# EAGLE board pcb (EAGLE 6.3)
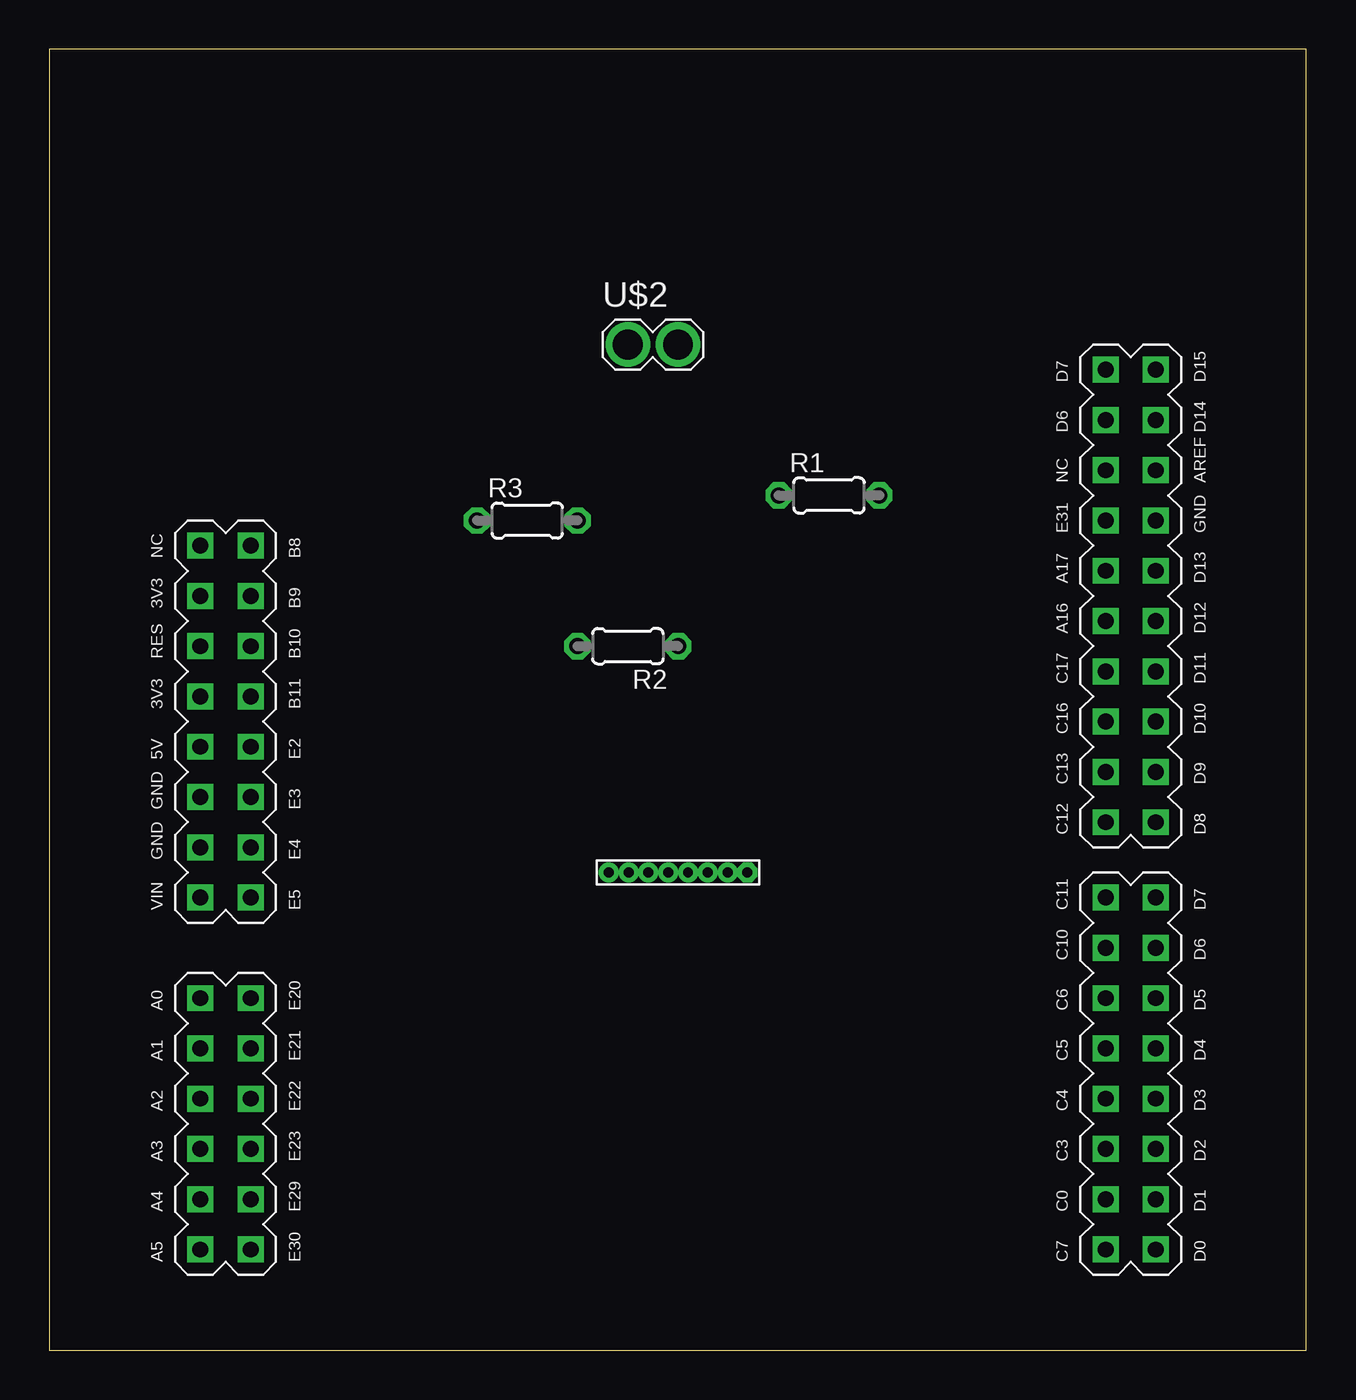
[diagram p0: board, top side]
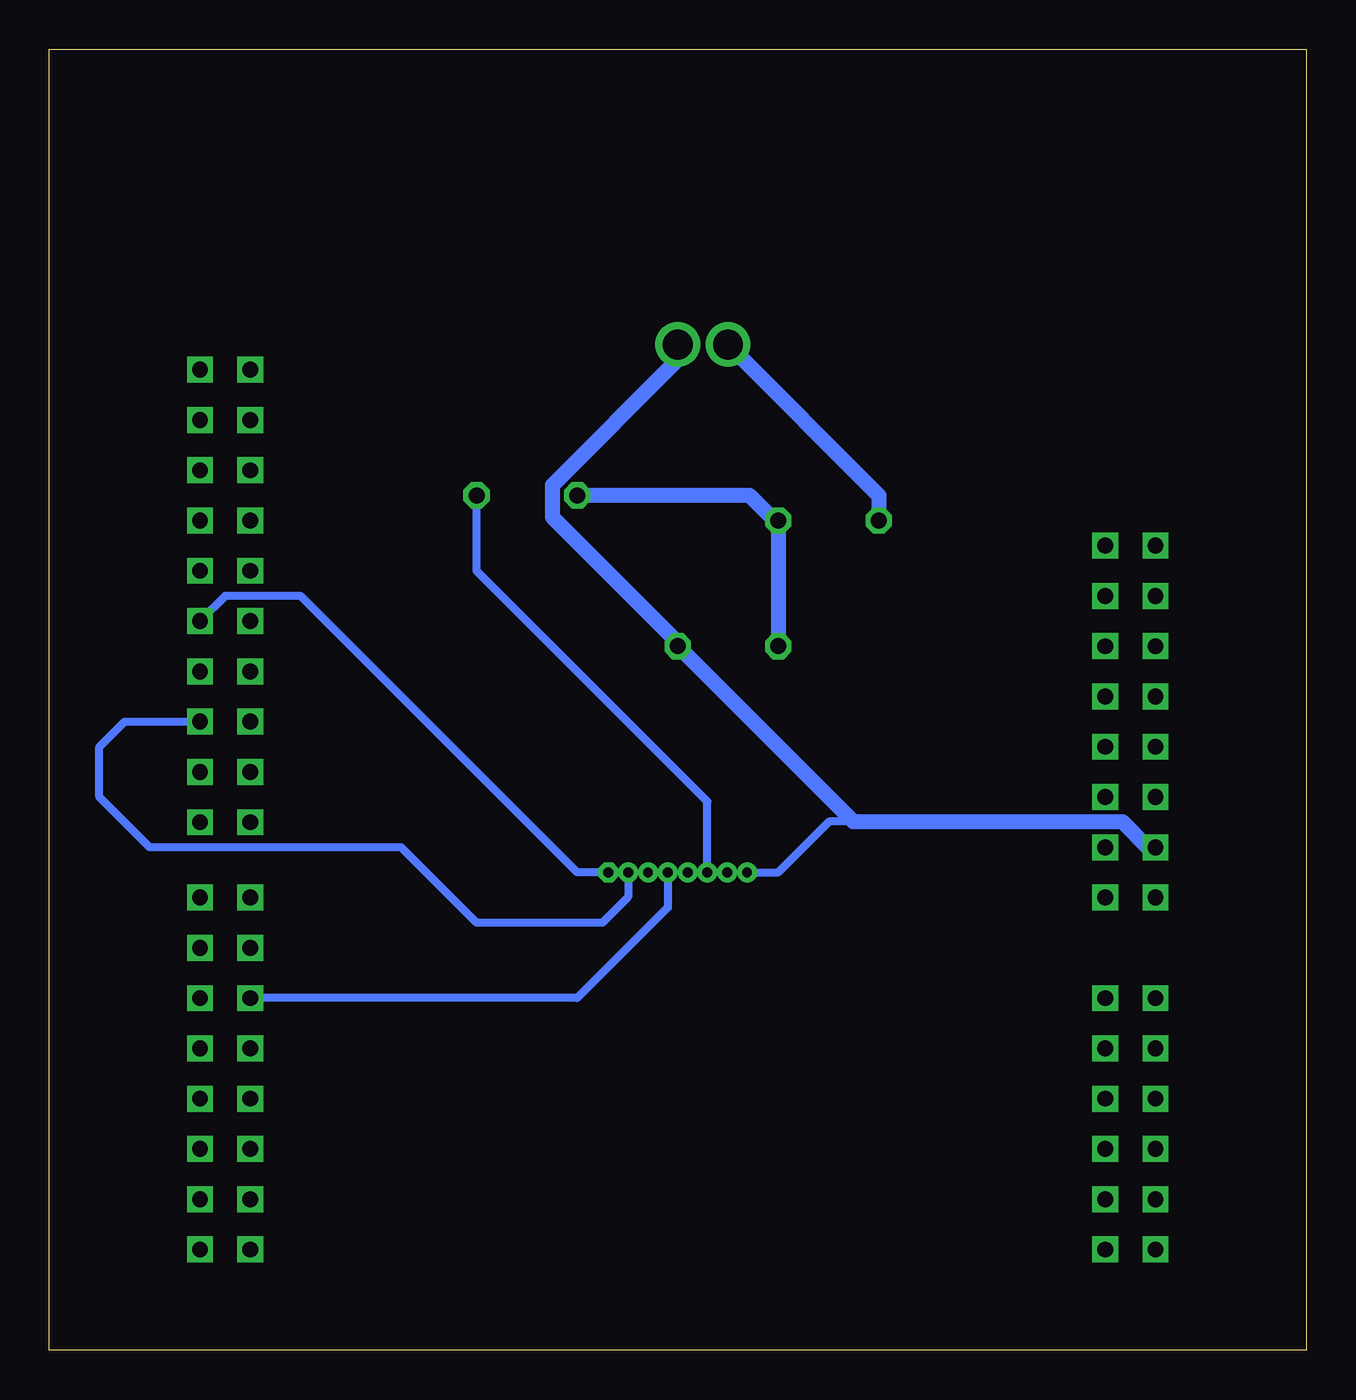
[diagram p1: board, bottom side, seen from below]

Size 63.48 x 65.71 mm. Coordinates in mm from the lower left corner, seen from the top.
Outline: 0,0 63.48,0 63.48,65.71 0,65.71 0,0
Copper layers (1*16): Top 0.035mm / dielectric 1.5mm / Bottom 0.035mm
Design rules "default *": minimum track width 30mil, minimum drill 24mil, track to track 8mil, track to pad 8mil, pad to pad 8mil, via to via 8mil, smd to smd 8mil, copper to edge 40mil, drill to drill 8mil, minimum pad ring 10mil, minimum via ring 8mil, stop-mask expansion 4mil, vias tented up to drill 0mil, thermal gap 10mil

## Footprints (pad centres in the part's own frame; a part is rotated, then mirrored left to right if it is on the bottom)
FRDM-KL25Z = drill 0.8 square: 3V3 -22.86,12.7; 5V -22.86,5.08; A0 -22.86,-7.62; A1 -22.86,-10.16; A2 -22.86,-12.7; A3 -22.86,-15.24; A4 -22.86,-17.78; A5 -22.86,-20.32; AREF 25.4,19.05; D0 25.4,-20.32; D1 25.4,-17.78; D2 25.4,-15.24; D3 25.4,-12.7; D4 25.4,-10.16; D5 25.4,-7.62; D6 25.4,-5.08; D7 25.4,-2.54; D8 25.4,1.27; D9 25.4,3.81; D10 25.4,6.35; D11 25.4,8.89; D12 25.4,11.43; D13 25.4,13.97; D14 25.4,21.59; D15 25.4,24.13; GND0 -22.86,0; GND1 -22.86,2.54; GND2 25.4,16.51; NC1 -22.86,15.24; NC2 22.86,19.05; P3V3 -22.86,7.62; PTA16 22.86,11.43; PTA17 22.86,13.97; PTB8 -20.32,15.24; PTB9 -20.32,12.7; PTB10 -20.32,10.16; PTB11 -20.32,7.62; PTC0 22.86,-17.78; PTC3 22.86,-15.24; PTC4 22.86,-12.7; PTC5 22.86,-10.16; PTC6 22.86,-7.62; PTC7 22.86,-20.32; PTC10 22.86,-5.08; PTC11 22.86,-2.54; PTC12 22.86,1.27; PTC13 22.86,3.81; PTC16 22.86,6.35; PTC17 22.86,8.89; PTD6 22.86,21.59; PTD7 22.86,24.13; PTE2 -20.32,5.08; PTE3 -20.32,2.54; PTE4 -20.32,0; PTE5 -20.32,-2.54; PTE20 -20.32,-7.62; PTE21 -20.32,-10.16; PTE22 -20.32,-12.7; PTE23 -20.32,-15.24; PTE29 -20.32,-17.78; PTE30 -20.32,-20.32; PTE31 22.86,16.51; RESET -22.86,10.16; VIN -22.86,-2.54
0204/5 = drill 0.813 octagon: 1 -2.54,0; 2 2.54,0
PTH-8-1MM = drill 0.5 pad 0.805 octagon: P$1 -3.5,0 | drill 0.5 pad 0.805: P$2 -2.5,0; P$3 -1.5,0; P$4 -0.5,0; P$5 0.5,0; P$6 1.5,0; P$7 2.5,0; P$8 3.5,0
BIGPIN-2 = drill 1.5: P$1 0,0; P$2 2.54,0

## Placement (x,y rotation side)
FRDM1  [FRDM-KL25Z]  30.48,25.4 0 top
R1  [0204/5]  39.37,43.18 0 top
R2  [0204/5]  29.21,35.56 180 top
R3  [0204/5]  24.13,41.91 0 top
U$1  PINHEAD-8  [PTH-8-1MM]  31.75,24.13 180 top
U$2  PINHEAD-2BIG  [BIGPIN-2]  29.21,50.8 0 top

## Library data of the parts
FRDM1 = Freedom
R1-R3 = rcl
U$1 U$2 = bt_electromech

## Nets
GND: FRDM1.GND0 R2.1 U$1.P$8 U$2.P$2
INPUT: R3.1 U$2.P$1
N$1: R1.2 U$1.P$6 U$1.P$7
N$2: FRDM1.D12 U$1.P$1
N$3: R1.1 R2.2 R3.2
N$4: FRDM1.D10 U$1.P$2
N$5: FRDM1.D11
N$6: FRDM1.PTC6 U$1.P$4
N$7: FRDM1.PTC5

## Tracks (layer width: path | path; a pad name or v marks a point on that pad's centre or on a via)
GND
  Bottom 0.406: 22.88,26.7 24.1,26.7 26.67,24.13 U$1.P$8
  Bottom 0.762: FRDM1.GND0 8,25.4 9.3,26.7 22.88,26.7 R2.1 31.93,35.92 38.08,42.06 38.08,43.71 31.75,50.04 U$2.P$2
INPUT
  Bottom 0.762: R3.1 21.59,43.18 U$2.P$1
N$1
  Bottom 0.406: U$1.P$7 U$1.P$6 30.25,27.71 41.91,39.37 R1.2
N$2
  Bottom 0.406: U$1.P$1 36.83,24.13 50.8,38.1 54.61,38.1 FRDM1.D12
N$3
  Bottom 0.762: R2.2 R3.2 27.03,42.09 28.12,43.18 R1.1
N$4
  Bottom 0.406: U$1.P$2 34.25,22.9 35.56,21.59 41.91,21.59 45.72,25.4 58.42,25.4 60.96,27.94 60.96,30.48 59.69,31.75 FRDM1.D10
N$6
  Bottom 0.406: U$1.P$4 32.25,22.36 36.83,17.78 FRDM1.PTC6